# Altium PCB 精简焊台.PcbDoc
Units mm, origin at the board's own origin, x right, y up, seen from the top; angles counter-clockwise.
Board outline 70 x 50.01 mm, 2 copper layers (Top Layer, Bottom Layer), stack 0.325 mm thick; 94 components, 71 nets, 283 pads, 209 vias.
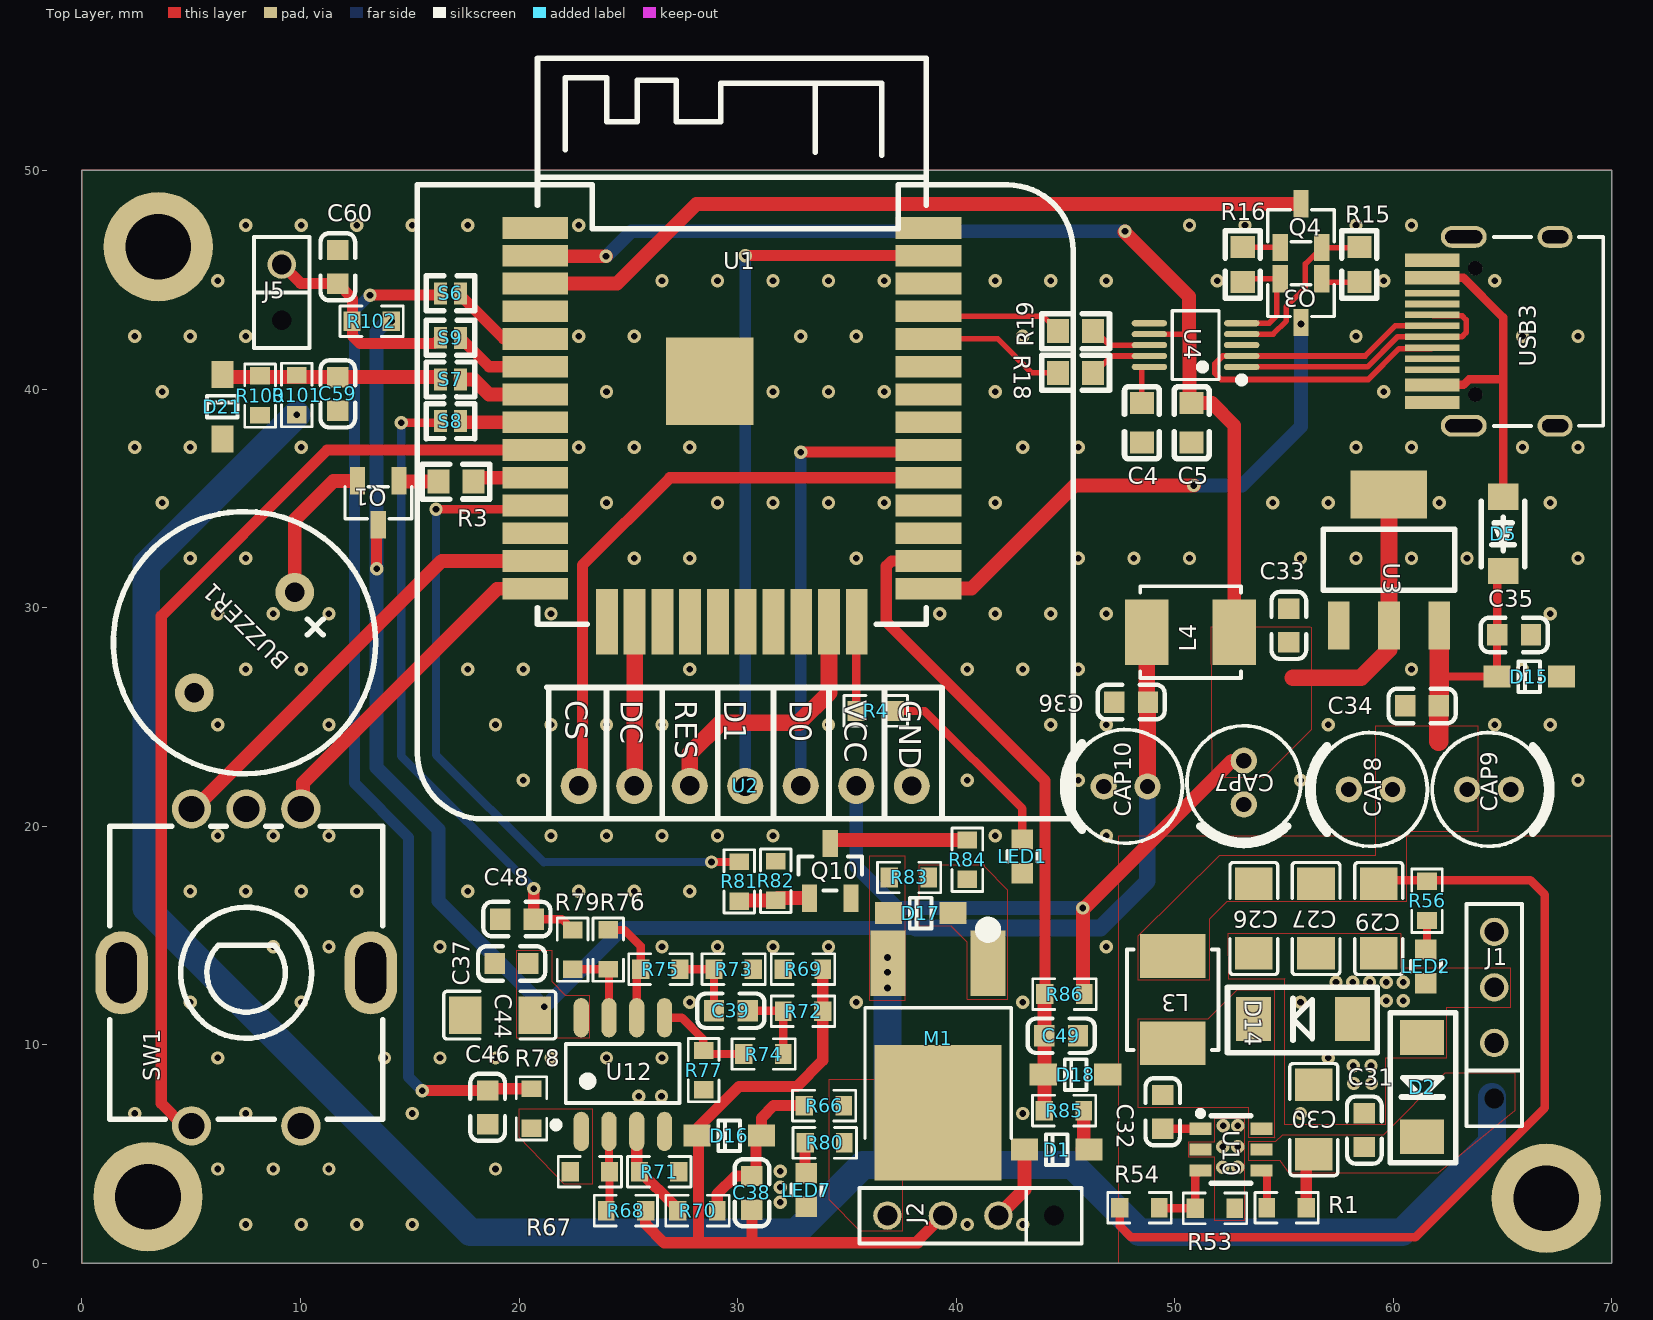
[diagram p0: Top Layer view]
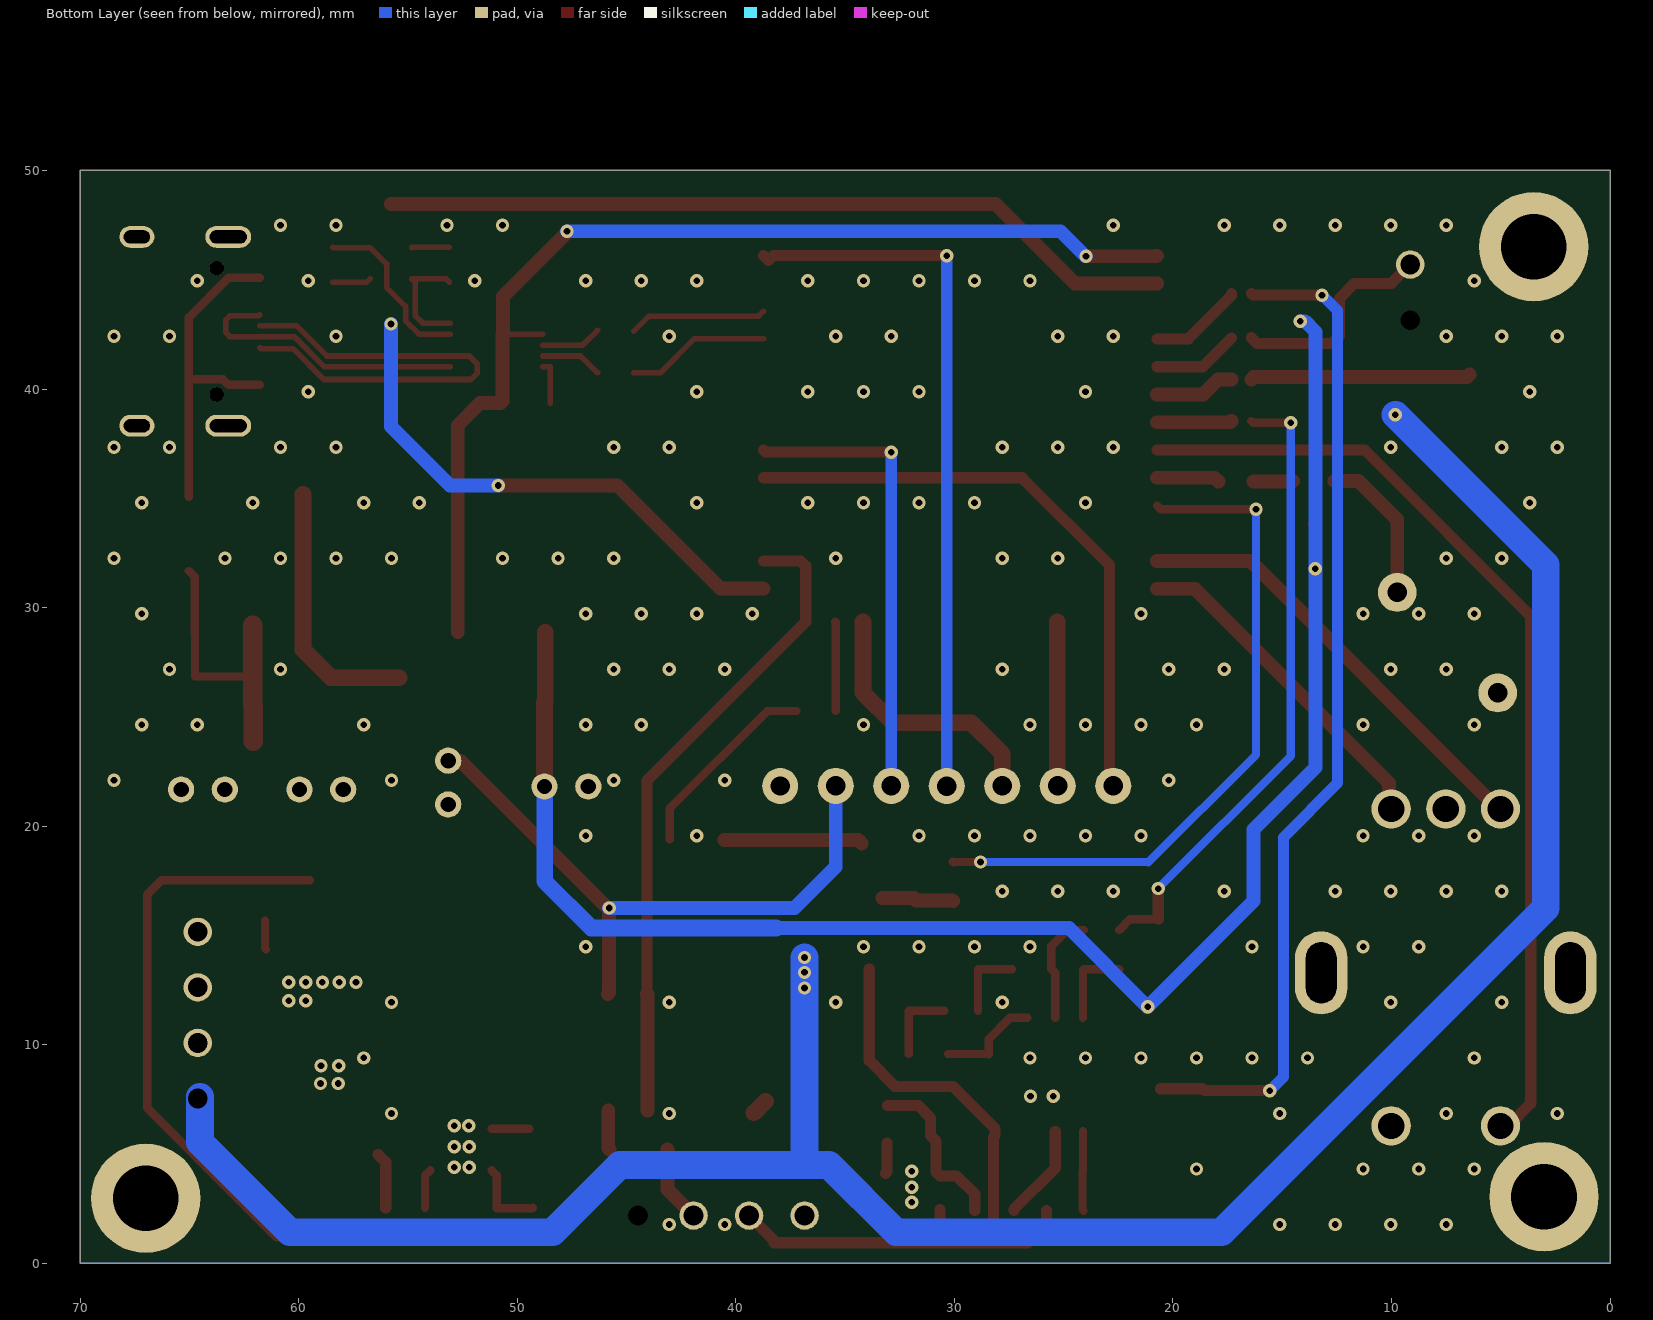
[diagram p1: Bottom Layer view, seen from below]

## Layer stack, top to bottom
Top Solder: solder mask 0.0102, Solder Resist, Dk 3.5
Top Layer: signal copper 0.0356
Dielectric 1: core 0.254, FR-4, Dk 4.2
Bottom Layer: signal copper 0.0356
Bottom Solder: solder mask 0.0102, Solder Resist, Dk 3.5

## Board outline
0,0 0,50.013 70.002,50.013 70.002,0

## Design rules (kind name [scope] priority, off if disabled: settings)
AssemblyTestPointUsage [All] p0: scope1count=1 scope1_0_kind=Board scope1_0_value=Board scope2count=1 scope2_0_kind=Board scope2_0_value=Board commentlength=0
AssemblyTestpoint [All] p0: scope1count=1 scope1_0_kind=Board scope1_0_value=Board scope2count=1 scope2_0_kind=Board scope2_0_value=Board commentlength=0
Clearance [All] p0: scope1count=1 scope1_0_kind=Board scope1_0_value=Board scope2count=1 scope2_0_kind=Board scope2_0_value=Board commentlength=0 gap=0.178
Clearance [All] p1: gap=0.178 ignorepadtopadclearanceinfootprint=FALSE
ComponentClearance [All] p0: scope1count=1 scope1_0_kind=Board scope1_0_value=Board scope2count=1 scope2_0_kind=Board scope2_0_value=Board commentlength=0 gap=0.254 collisioncheckmode=3
DiffPairsRouting [All] p0: scope1count=1 scope1_0_kind=Board scope1_0_value=Board scope2count=1 scope2_0_kind=Board scope2_0_value=Board commentlength=0
FabricationTestPointUsage [All] p0: scope1count=1 scope1_0_kind=Board scope1_0_value=Board scope2count=1 scope2_0_kind=Board scope2_0_value=Board commentlength=0 valid=0 allowmultiple=FALSE
FabricationTestpoint [All] p0: scope1count=1 scope1_0_kind=Board scope1_0_value=Board scope2count=1 scope2_0_kind=Board scope2_0_value=Board commentlength=0 side=3 testpointundercomponent=TRUE minsize=1.016 maxsize=2.54 preferedsize=1.524 minholesize=0 maxholesize=1.016 preferedholesize=0.813 testpointgrid=0.025
FanoutControl Fanout_BGA [All] p0 off: scope1count=1 scope1_0_kind=Board scope1_0_value=Board scope2count=1 scope2_0_kind=Board scope2_0_value=Board commentlength=69 // Protel DXP Scope 1 Expression Was: IsBGA   Fanout_BGA (Default Rule)
FanoutControl Fanout_LCC [All] p0 off: scope1count=1 scope1_0_kind=Board scope1_0_value=Board scope2count=1 scope2_0_kind=Board scope2_0_value=Board commentlength=69 // Protel DXP Scope 1 Expression Was: IsLCC   Fanout_LCC (Default Rule)
FanoutControl Fanout_SOIC [All] p0 off: scope1count=1 scope1_0_kind=Board scope1_0_value=Board scope2count=1 scope2_0_kind=Board scope2_0_value=Board commentlength=71 // Protel DXP Scope 1 Expression Was: IsSOIC   Fanout_SOIC (Default Rule)
FanoutControl Fanout_Small [All] p0 off: scope1count=1 scope1_0_kind=Board scope1_0_value=Board scope2count=1 scope2_0_kind=Board scope2_0_value=Board commentlength=84 // Protel DXP Scope 1 Expression Was: (CompPinCount < 5)   Fanout_Small (Default Rule)
FanoutControl Fanout_Default [All] p0: scope1count=1 scope1_0_kind=Board scope1_0_value=Board scope2count=1 scope2_0_kind=Board scope2_0_value=Board commentlength=30 // Fanout_Default (Default Rule)
Height [All] p0: scope1count=1 scope1_0_kind=Board scope1_0_value=Board scope2count=1 scope2_0_kind=Board scope2_0_value=Board commentlength=0
HoleSize [All] p0: scope1count=1 scope1_0_kind=Board scope1_0_value=Board scope2count=1 scope2_0_kind=Board scope2_0_value=Board commentlength=0 absolutevalues=TRUE maxlimit=2.54 minlimit=0.025 maxpercent=80.000 minpercent=20.000
HoleToHoleClearance [All] p0: scope1count=1 scope1_0_kind=Board scope1_0_value=Board scope2count=1 scope2_0_kind=Board scope2_0_value=Board commentlength=0
LayerPairs [All] p0: scope1count=1 scope1_0_kind=Board scope1_0_value=Board scope2count=1 scope2_0_kind=Board scope2_0_value=Board commentlength=0 enforce=TRUE
MinimumSolderMaskSliver [All] p0: scope1count=1 scope1_0_kind=Board scope1_0_value=Board scope2count=1 scope2_0_kind=Board scope2_0_value=Board commentlength=0
NetAntennae [All] p0: scope1count=1 scope1_0_kind=Board scope1_0_value=Board scope2count=1 scope2_0_kind=Board scope2_0_value=Board commentlength=0
PasteMaskExpansion [All] p0: scope1count=1 scope1_0_kind=Board scope1_0_value=Board scope2count=1 scope2_0_kind=Board scope2_0_value=Board commentlength=0 expansion=0
PlaneClearance [All] p0: scope1count=1 scope1_0_kind=Board scope1_0_value=Board scope2count=1 scope2_0_kind=Board scope2_0_value=Board commentlength=0 clearance=0.508
PlaneConnect [All] p0: scope1count=1 scope1_0_kind=Board scope1_0_value=Board scope2count=1 scope2_0_kind=Board scope2_0_value=Board commentlength=0 planeconnectstyle=Relief reliefexpansion=0.508 reliefentries=4 reliefconductorwidth=0.254 reliefairgap=0.254
PolygonConnect PolygonConnect_2 [All] p0: scope1count=1 scope1_0_kind=Board scope1_0_value=Board scope2count=1 scope2_0_kind=Board scope2_0_value=Board commentlength=0 connectstyle=Direct reliefconductorwidth=0.254 reliefentries=4 polygonreliefangle="90 Angle"
PolygonConnect PolygonConnect_1 [All] p0 off: scope1count=1 scope1_0_kind=Board scope1_0_value=Board scope2count=1 scope2_0_kind=Board scope2_0_value=Board commentlength=44 connectstyle=Direct reliefconductorwidth=0.254 reliefentries=4 polygonreliefangle="90 Angle" // Protel DXP Scope 1 Expression Was: IsVia
PolygonConnect [All] p0: scope1count=1 scope1_0_kind=Board scope1_0_value=Board scope2count=1 scope2_0_kind=Board scope2_0_value=Board commentlength=0 connectstyle=Relief reliefconductorwidth=0.254 reliefentries=4 polygonreliefangle="90 Angle"
PolygonConnect PolygonConnect_2 [All] p1: connectstyle=Direct reliefconductorwidth=0.254 reliefentries=4 polygonreliefangle="90 Angle" airgapwidth=0.254
PolygonConnect PolygonConnect_1 [IsVia] p2: connectstyle=Direct reliefconductorwidth=0.254 reliefentries=4 polygonreliefangle="90 Angle" airgapwidth=0.254
PolygonConnect [All] p3: connectstyle=Relief reliefconductorwidth=0.254 reliefentries=4 polygonreliefangle="90 Angle" airgapwidth=0.254
RoutingCorners [All] p0: scope1count=1 scope1_0_kind=Board scope1_0_value=Board scope2count=1 scope2_0_kind=Board scope2_0_value=Board commentlength=0 cornerstyle=45-Degree minsetback=2.54 maxsetback=2.54
RoutingLayers [All] p0: scope1count=1 scope1_0_kind=Board scope1_0_value=Board scope2count=1 scope2_0_kind=Board scope2_0_value=Board commentlength=0 top layer=Automatic bottom layer=Automatic
RoutingPriority [All] p0: scope1count=1 scope1_0_kind=Board scope1_0_value=Board scope2count=1 scope2_0_kind=Board scope2_0_value=Board commentlength=0
RoutingTopology [All] p0: scope1count=1 scope1_0_kind=Board scope1_0_value=Board scope2count=1 scope2_0_kind=Board scope2_0_value=Board commentlength=0 topology=Shortest
RoutingVias [All] p0: scope1count=1 scope1_0_kind=Board scope1_0_value=Board scope2count=1 scope2_0_kind=Board scope2_0_value=Board commentlength=0 holewidth=0.711 width=1.27 viastyle="Through Hole" minholewidth=0.711 minwidth=1.27 maxholewidth=0.711 maxwidth=1.27
RoutingVias [All] p1: holewidth=0.711 width=1.27 viastyle="Through Hole" minholewidth=0.711 minwidth=1.27 maxholewidth=0.711 maxwidth=1.27
ShortCircuit [All] p0: scope1count=1 scope1_0_kind=Board scope1_0_value=Board scope2count=1 scope2_0_kind=Board scope2_0_value=Board commentlength=0 allowed=FALSE
SilkToBoardRegionClearance [All] p0: scope1count=1 scope1_0_kind=Board scope1_0_value=Board scope2count=1 scope2_0_kind=Board scope2_0_value=Board commentlength=0
SilkToSilkClearance [All] p0: scope1count=1 scope1_0_kind=Board scope1_0_value=Board scope2count=1 scope2_0_kind=Board scope2_0_value=Board commentlength=0
SilkToSolderMaskClearance [All] p0 off: scope1count=1 scope1_0_kind=Board scope1_0_value=Board scope2count=1 scope2_0_kind=Board scope2_0_value=Board commentlength=44 // Protel DXP Scope 1 Expression Was: IsPad
SolderMaskExpansion [All] p0: scope1count=1 scope1_0_kind=Board scope1_0_value=Board scope2count=1 scope2_0_kind=Board scope2_0_value=Board commentlength=0 expansion=0.064
SolderMaskExpansion [All] p1: expansion=0.064
UnRoutedNet [All] p0: scope1count=1 scope1_0_kind=Board scope1_0_value=Board scope2count=1 scope2_0_kind=Board scope2_0_value=Board commentlength=0
UnpouredPolygon [All] p0: scope1count=1 scope1_0_kind=Board scope1_0_value=Board scope2count=1 scope2_0_kind=Board scope2_0_value=Board commentlength=0
Width Width_1 [All] p0: scope1count=1 scope1_0_kind=NetClass scope1_0_value="New Class" scope2count=1 scope2_0_kind=Board scope2_0_value=Board commentlength=0 maxlimit=2.54 minlimit=0.254 preferedwidth=0.508
Width [All] p0: scope1count=1 scope1_0_kind=Board scope1_0_value=Board scope2count=1 scope2_0_kind=Board scope2_0_value=Board commentlength=0 maxlimit=2.54 minlimit=0.254 preferedwidth=0.254
Width Width_1 [InNetClass('New Class')] p1: maxlimit=2.54 minlimit=0.254 preferedwidth=0.508
Width [All] p2: maxlimit=2.54 minlimit=0.254 preferedwidth=0.254
30 further rules are at their usual default settings.

## Classes and differential pairs
net class "New Class": 5V AVCC DVCC NetD17_1 NetJ2_4 VBUS VIN

## Components (designator, comment, footprint, x,y, rotation, side; value= is the part's Value field where it differs from the comment)
BUZZER1 "GMC1205YA-16R2048" BUZ-TH_BD12.0-P6.50-D0.6-FD 7.442,28.397 r45 top
C4 "1u" C0603 48.501,38.456 r270 top
C5 "10u" C0603 50.775,38.456 r90 top
C26 "10uF" 电容 53.848,15.875 r270 top
C27 "10uF" 电容 56.694,15.875 r270 top
C29 "0.1uF" 电容 59.563,15.875 r270 top
C30 "4.7uF" 电容 56.134,6.477 r90 top
C31 "0.1uF" 0603C 58.674,6.096 r90 top
C32 "0.1uF" 0603C 49.454,6.934 r270 top
C33 "0.1uF" 0603C 55.22,29.185 r270 top
C34 "0.1uF" 0603C 61.316,25.502 r0 top
C35 "0.1uF" 0603C 65.532,28.753 r0 top
C36 "0.1uF" 0603C 48.006,25.679 r0 top
C37 "0.1uF" 0603C 19.66,13.716 r0 top
C38 "0.1uF" 0603C 30.658,3.226 r270 top
C39 "0.1uF" 0603C 29.693,11.557 r180 top
C44 "4.7uF" 电容 19.025,11.582 r0 top
C46 "10nF" 0603C 18.567,7.137 r270 top
C48 "10nF" 0603C 19.906,15.748 r180 top
C49 "0.1uF" 0603C 44.806,10.414 r180 top
C59 "1uF" 0603C 11.709,39.776 r270 top
C60 "1uF" 0603C 11.709,45.593 r90 top
CAP7 "22uF" CAPX-5.0 53.162,21.996 r90 top
CAP8 "22uF" CAPX-5.0 58.963,21.679 r0 top
CAP9 "100uF" CAPX-5.0 64.38,21.679 r180 top
CAP10 "22uF" CAPX-5.0 47.752,21.819 r0 top
D1 "1N4148" LC-SOD-123 44.602,5.207 r0 top
D2 "TVS" "二极管 SMA(DO-214AC)" 61.316,10.123 r270 top
D5 "1N5819HW-7-F" SOD-123_L2.8-W1.8-LS3.7-FD 65.024,33.376 r270 top
D14 "B5819" "二极管 SMA(DO-214AC)" 57.926,11.176 r180 top
D15 "SMA6.0A" LC-SOD-123 66.218,26.848 r0 top
D16 "1N4148" LC-SOD-123 29.616,5.842 r0 top
D17 "ZMM12" LC-SOD-123 38.379,16.027 r0 top
D18 "SMF3.3A" LC-SOD-123 45.466,8.636 r0 top
D21 "SMF3.3A" LC-SOD-123 6.426,39.192 r270 top
J1 "CONN4" SIP-4 64.618,7.544 r90 top
J2 "CONN4" SIP-4 44.475,2.184 r180 top
J5 "NTC 10K" SIP-2 9.144,43.155 r90 top
L3 "22uH" LIN0520 49.911,12.065 r90 top
L4 "22uH" LIN0520 50.724,28.88 r180 top
LED1 "LED" LC-0603-LED 43.028,18.618 r270 top
LED2 "LED" LC-0603-LED 61.493,13.589 r270 top
LED7 "LED" LC-0603-LED 33.147,3.353 r270 top
M1 "MOS-ASM6115" MOS-ASM6115 39.802,9.5 r90 top
Q1 "S8050" SOT-23-3_L2.9-W1.3-P1.90-LS2.4-BR 13.564,34.798 r90 top
Q3 "S8050" SOT-23-3_L2.9-W1.3-P1.90-LS2.4-BR 55.778,44.044 r90 top
Q4 "S8050" SOT-23-3_L2.9-W1.3-P1.90-LS2.4-BR 55.778,47.473 r270 top
Q10 "S8050" LC-SOT-23(SOT-23-3) 34.239,17.958 r270 top
R1 "100K" 0603R 55.118,2.54 r0 top
R3 "10k" R0603 17.12,35.763 r0 top
R4 "2K" 0603R 36.322,25.273 r180 top
R15 "10k" R0603 58.445,45.695 r90 top
R16 "10k" R0603 53.111,45.695 r270 top
R18 "220R" R0603 45.466,40.742 r180 top
R19 "220R" R0603 45.466,42.647 r180 top
R53 "18K" 0603R 51.841,2.515 r180 top
R54 "100K" 0603R 48.387,2.54 r180 top
R56 "3K" 0603R 61.544,16.586 r90 top
R66 "10K" 0603R 33.96,7.214 r180 top
R67 "200K" 0603R 23.241,4.191 r180 top
R68 "2K" 0603R 24.892,2.413 r0 top
R69 "0.02R" 0603R 32.995,13.462 r180 top
R70 "2K" 0603R 28.169,2.413 r180 top
R71 "200K" 0603R 26.416,4.191 r0 top
R72 "10R" 0603R 32.995,11.532 r0 top
R73 "10R" 0603R 29.82,13.462 r0 top
R74 "1K" 0603R 31.191,9.576 r180 top
R75 "1K" 0603R 26.467,13.462 r180 top
R76 "20K" 0603R 24.079,14.351 r90 top
R77 "20K" 0603R 28.448,8.839 r270 top
R78 "1K" 0603R 20.574,7.087 r270 top
R79 "10K" 0603R 22.454,14.351 r270 top
R80 "10K" 0603R 33.985,5.512 r180 top
R81 "1K" 0603R 30.074,17.475 r270 top
R82 "51K" 0603R 31.75,17.501 r270 top
R83 "10K" 0603R 37.846,17.653 r180 top
R84 "2K" 0603R 40.513,18.466 r270 top
R85 "1K" 0603R 44.938,6.985 r180 top
R86 "10K" 0603R 44.958,12.319 r180 top
R100 "1K" 0603R 8.153,39.7 r90 top
R101 "10K" 0603R 9.83,39.726 r270 top
R102 "10K" 0603R 13.259,43.104 r0 top
S6 "Solder" SW_HAND_WELD_JX 16.866,44.374 r180 top
S7 "Solder" SW_HAND_WELD_JX 16.866,40.437 r180 top
S8 "Solder" SW_HAND_WELD_JX 16.866,38.534 r180 top
S9 "Solder" SW_HAND_WELD_JX 16.866,42.342 r180 top
SW1 "Rotary Enc" SW-TH_PEC11R-4XXXF-SXXXX 7.518,13.538 r0 top
U1 "ESP32-S" WIRELM-SMD_ESP32-S 29.735,38.366 r0 top
U2 "" "OLED 12864 SPI 7P" 30.352,21.84 r0 top
U3 "AMS1117" "LDO线性稳压 (SOT-223)" 59.803,32.185 r270 top
U4 "CH340E" MSOP-10_L3.0-W3.0-P0.50-LS5.0-BL 50.952,42.012 r90 top
U10 "LMR16006" "开关电源 (LMR16006)" 52.959,5.334 r270 top
U12 "GS8552" LC-SOP-8-150MIL 24.74,8.636 r0 top
USB3 "USB-TYPEC-16P" USB-TYPE-C-16P 67.404,38.321 r90 top

## Footprints (in the part's own frame and the unit in brackets; to place one, negate y for a bottom-side part, rotate by r counter-clockwise, add the part's x,y. Pads: shape width x height; smd on the part's side, far side on the other; paste and mask are expansions set on the pad)
0603C [mm]
  rect 0.93x0.98 smd: 1(-0.77,0) 2(0.77,0)
  silkscreen extent -1.53,-0.79 1.54,0.79
0603R [mm]
  rect 0.762x0.9 smd: 1(-0.9,0)
  rect 0.8x0.9 smd: 2(0.9,0)
  silkscreen extent -1.45,-0.7 1.45,0.7
BUZ-TH_BD12.0-P6.50-D0.6-FD [mil]
  round 70 hole 35.4: 1(128,0) 2(-128,0)
  silkscreen extent -236,-236 236,236
C0603 [mm]
  rect 1x1.1 smd: 1(-0.9,0) 2(0.9,0)
  silkscreen extent -1.65,-0.8 1.65,0.8
CAPX-5.0 [mm]
  round 1.2 hole 0.7: 1(1,0) 2(-1,0)
  silkscreen extent -2.83,-2.6 2.6,2.6
LC-0603-LED [mm]
  rect 0.93x0.98 smd: A(-0.77,0) K(0.77,0)
  silkscreen extent -0.25,-0.69 0.25,0.69
LC-SOD-123 [mm]
  rect 1.25x1 smd: 1(1.475,0) 2(-1.475,0)
  silkscreen extent -0.5,-0.7 0.5,0.7
LC-SOP-8-150MIL [mm]
  oval 0.7x1.8 smd: 1(-1.893,-2.6) 2(-0.623,-2.6) 3(0.647,-2.6) 4(1.917,-2.6) 5(1.917,2.6) 6(0.647,2.6) 7(-0.623,2.6) 8(-1.893,2.6)
  silkscreen extent -3.2,-2.45 2.6,1.4
LC-SOT-23(SOT-23-3) [mm]
  rect 1.25x0.7 smd: 1(1.25,-0.95) 2(1.25,0.95) 3(-1.25,0)
  silkscreen extent -0.65,-1.46 0.9,1.46
"LDO线性稳压 (SOT-223)" [mm]
  rect 2.2x1 smd: 1(3,-2.3) 2(3,0) 3(3,2.3)
  rect 2.2x3.5 smd: 2(-3,0)
  silkscreen extent -1.4,-3 1.4,3
LIN0520 [mm]
  rect 2x3 smd: 1(-2,0) 2(2,0)
  silkscreen extent -2.3,-2.1 2.3,2.1
MOS-ASM6115 [mm]
  rect 3x1.6 smd: 1(4.233,-1.662) 3(4.233,2.918)
  rect 6.2x5.8 smd: 2(-2.615,0.628)
  silkscreen extent -3.78,-2.72 6.06,3.97
MSOP-10_L3.0-W3.0-P0.50-LS5.0-BL [mm]
  oval 0.28x1.62 smd: 1(-1,-2.11) 2(-0.5,-2.11) 3(0,-2.11) 4(0.5,-2.11) 5(1,-2.11) 6(1,2.11) 7(0.5,2.11) 8(0,2.11) 9(-0.5,2.11) 10(-1,2.11)
  silkscreen extent -1.74,-2.26 1.58,1.07
"OLED 12864 SPI 7P" [mm]
  round 1.65 hole 0.89: 1(7.619,-0.001) 2(5.079,0.004) 3(2.539,0.004) 4(-0.001,-0.004) 5(-2.539,0.001) 6(-5.079,0.001) 7(-7.619,0.004)
  silkscreen extent -15,-1.5 15,27.5
R0603 [mm]
  rect 1x1.1 smd: 1(-0.8,0) 2(0.8,0)
  silkscreen extent -1.55,-0.8 1.55,0.81
SIP-2 [mm]
  round 0 hole 0.9: 1(0,0)
  round 1.3 hole 0.9: 2(2.54,0)
  silkscreen extent -1.27,-1.27 3.81,1.27
SIP-4 [mm]
  round 0 hole 0.9: 1(0,0)
  round 1.3 hole 0.9: 2(2.54,0) 3(5.08,0) 4(7.62,0)
  silkscreen extent -1.27,-1.27 8.89,1.27
SOD-123_L2.8-W1.8-LS3.7-FD [mm]
  rect 1.2x1.4 smd: 1(-1.7,0) 2(1.7,0)
  silkscreen extent -1.5,-1 1.5,1
SOT-23-3_L2.9-W1.3-P1.90-LS2.4-BR [mm]
  rect 1.25x0.7 smd: 1(1,-0.95) 2(1,0.95) 3(-1,0)
  silkscreen extent -0.73,-1.53 0.73,1.53
SW-TH_PEC11R-4XXXF-SXXXX [mm]
  round 1.8 hole 1.2: 1(2.5,-7.25) 2(-2.5,-7.25) A(2.5,7.25) B(-2.5,7.25) C(0,7.25)
  oval 2.4x3.8 hole 1.4 slot 2.8 at 90 deg: MT1(5.7,-0.25) MT2(-5.7,-0.25)
  silkscreen extent -6.25,-6.95 6.25,6.45
SW_HAND_WELD_JX [mm]
  rect 0.6x1 smd: 1(-0.45,0.002) 2(0.45,-0.003)
  silkscreen extent -1.1,-0.8 1.1,0.8
USB-TYPE-C-16P [mm]
  oval 1x2.1 hole 0.6 slot 1.7 at 90 deg: 0(0,4.18) 0(8.64,4.18)
  oval 1x1.6 hole 0.6 slot 1.2 at 90 deg: 0(0,0) 0(8.64,0)
  rect 0.6x2.5 smd: A1(1.07,5.625) A4(1.87,5.625) A9(6.77,5.625) A12(7.57,5.625)
  rect 0.3x2.5 smd: A5(3.07,5.625) A6(4.07,5.625) A7(4.57,5.625) A8(5.57,5.625) B5(6.07,5.625) B6(5.07,5.625) B7(3.57,5.625) B8(2.57,5.625)
  round 0.65 hole 0.65 slot 0.655 at 90 deg: G(1.43,3.65) G(7.21,3.65)
  silkscreen extent -0.01,-2.2 8.64,2.79
WIRELM-SMD_ESP32-S [mm]
  rect 3x1 smd: 1(-9,9.005) 2(-9,7.735) 3(-9,6.465) 4(-9,5.195) 5(-9,3.925) 6(-9,2.655) 7(-9,1.385) 8(-9,0.115) 9(-9,-1.155) 10(-9,-2.425) 11(-9,-3.695) 12(-9,-4.965) 13(-9,-6.235) 14(-9,-7.505) 25(9,-7.505) 26(9,-6.235) 27(9,-4.965) 28(9,-3.695) 29(9,-2.425) 30(9,-1.155) 31(9,0.115) 32(9,1.385) 33(9,2.655) 34(9,3.925) 35(9,5.195) 36(9,6.465) 37(9,7.735) 38(9,9.005)
  rect 1x3 smd: 15(-5.715,-9.005) 16(-4.445,-9.005) 17(-3.175,-9.005) 18(-1.905,-9.005) 19(-0.635,-9.005) 20(0.635,-9.005) 21(1.905,-9.005) 22(3.175,-9.005) 23(4.445,-9.005) 24(5.715,-9.005)
  rect 4x4 smd: 39(-1,1.995)
  silkscreen extent -8.89,-9.13 8.89,16.78
"二极管 SMA(DO-214AC)" [mil]
  rect 63x78.74 smd: 1(-8,0) 2(170.56,0)
  silkscreen extent -53,-57 217,61
"开关电源 (LMR16006)" [mm]
  rect 0.55x1 smd: 1(-0.823,-1.786) 2(0.127,-1.786) 3(1.077,-1.786) 4(1.077,1.014) 5(0.127,1.014) 6(-0.823,1.014)
  silkscreen extent -1.65,-1.91 1.68,0.51
电容 [mm] "1206"
  rect 1.485x1.728 smd: 1(-1.493,-0.228) 2(1.692,-0.228)
  silkscreen extent -2.46,-1.32 2.66,0.86

## Part data
D2: library part B5819
R1 R53: library part 2K
R54: library part 10K
U2: library part 0.96OLED
U3: "线性稳压3.3V-5V 1A"
U10: library part HT7463B

## Free pads (board coordinates)
  round 5 hole 3 unplated: 8(3.5,46.513) 10(3.025,3.051) 10(67.002,2.975)

## Via types
v1: diameter 0.61, hole 0.305, Top Layer to Bottom Layer, 167 vias
v2: diameter 0.61, hole 0.305, Top Layer to Bottom Layer, tented both sides, 42 vias

## Nets (pads, with @x,y where several pads share a name; then routed paths per layer and width w, separated by ;. In a path a pad name is that pad's centre, name@x,y a point inside that pad or via, vN(x,y) a via of type N, cw(c..) or ccw(c..) an arc to the next point about the centre after c; other vN are vias at no path point)
5V: C26.1 C27.1 C29.1 C34.2 C35.1 CAP8.1 CAP9.1 D5.2 D15.2 L3.2 R54.2 R56.2 U3.3 | length 53.3
  Top Layer w0.381: R54.2 47.487,1.713 48.006,1.194 61.011,1.194 66.929,7.112 66.929,16.866 66.269,17.526 C29.1@59.493,17.526 ; 62.111,26.848 D15.2 64.743,28.734 C35.1 64.762,31.414 D5.2
  Top Layer w0.889: 62.086,23.884 C34.2 62.111,25.527 62.111,26.848 62.103,26.856 U3.3
AVCC: C36.2 C37.2 C44.2 CAP10.1 L4.2 Q1.3 R102.2 U12.8 | length 78.4
  Top Layer w0.508: v2(13.487,31.775) 13.487,33.722 Q1.3
  Top Layer w0.762: L4.2 48.724,25.684 48.752,25.655 CAP10.1
  Bottom Layer w0.635: v2(14.173,43.104) 13.97,43.104 13.487,42.621 v2(13.487,31.775) 13.487,22.682 16.319,19.85 16.319,16.573 v2(21.158,11.735) 24.765,15.342 38.151,15.342
  Bottom Layer w0.762: 38.151,15.342 46.609,15.342 48.743,17.475 CAP10.1@48.743,21.819
DVCC: C5.2 C33.2 CAP7.1 L4.1 R86.1 U1.2 U2.2 U3.2 U4.7 | length 91.3
  Top Layer w0.254: U4.7 50.656,42.512 50.673,42.494
  Top Layer w0.635: U1.2 20.76,46.076 v2(23.978,46.076) ; R86.1 45.796,12.381 v2(45.796,16.256) 45.872,16.256 52.613,22.996 CAP7.1 ; v2(47.727,47.219) 47.701,47.193 50.656,44.239 50.656,42.512 ; 50.673,42.494 50.673,39.457 C5.2 51.703,39.356 52.724,38.335 L4.1
  Top Layer w0.762: 55.397,26.797 58.522,26.797 59.803,28.078 59.803,29.185 U3.2@59.803,35.185
  Bottom Layer w0.635: v2(23.978,46.076) 24.003,46.076 25.146,47.219 v2(47.727,47.219) ; U2.2 35.43,18.138 37.313,16.256 v2(45.796,16.256)
GND: BUZZER1.2 C4.2 C5.1 C26.2 C27.2 C29.2 C30.2 C31.2 C33.1 C34.1 C35.2 C36.1 C37.1 C44.1 C46.2 C48.2 C49.1 C59.2 C60.2 CAP7.2 CAP8.2 CAP9.2 CAP10.2 D2.1 D14.1 D15.1 D18.1 D21.1 J1.3 J2.1 J5.1 LED1.K LED2.K LED7.K Q10.2 R53.1 R69.2 R71.2 R73.2 R77.2 R82.1 R100.1 SW1.1 SW1.C U1.1 U1.15 U1.38 U1.39 U2.1 U3.1 U4.3 U10.2 U12.4 USB3.0 USB3.A1 USB3.A12
  other v1: 7.493,1.778 10.033,1.778 12.573,1.778 15.113,1.778 40.513,1.778 43.053,1.778 6.223,4.318 8.763,4.318 11.303,4.318 18.923,4.318 2.413,6.858 7.493,6.858 15.113,6.858 43.053,6.858 55.753,6.858 6.223,9.398 13.843,9.398 16.383,9.398 18.923,9.398 21.463,9.398 24.003,9.398 26.543,9.398 57.023,9.398 4.953,11.938 10.033,11.938 27.813,11.938 35.433,11.938 43.053,11.938 55.753,11.938 8.763,14.478 11.303,14.478 16.383,14.478 26.543,14.478 29.083,14.478 31.623,14.478 34.163,14.478 46.863,14.478 4.953,17.018 7.493,17.018 10.033,17.018 12.573,17.018 17.653,17.018 22.733,17.018 25.273,17.018 27.813,17.018 6.223,19.558 8.763,19.558 11.303,19.558 21.463,19.558 24.003,19.558 26.543,19.558 29.083,19.558 31.623,19.558 41.783,19.558 46.863,19.558 20.193,22.098 40.513,22.098 45.593,22.098 55.753,22.098 68.453,22.098 6.223,24.638 11.303,24.638 18.923,24.638 21.463,24.638 24.003,24.638 26.543,24.638 34.163,24.638 44.323,24.638 46.863,24.638 57.023,24.638 64.643,24.638 67.183,24.638 7.493,27.178 10.033,27.178 17.653,27.178 20.193,27.178 27.813,27.178 40.513,27.178 43.053,27.178 45.593,27.178 60.833,27.178 65.913,27.178 6.223,29.718 8.763,29.718 11.303,29.718 21.463,29.718 39.243,29.718 41.783,29.718 44.323,29.718 46.863,29.718 67.183,29.718 4.953,32.258 7.493,32.258 25.273,32.258 27.813,32.258 35.433,32.258 45.593,32.258 48.133,32.258 50.673,32.258 55.753,32.258 58.293,32.258 60.833,32.258 63.373,32.258 68.453,32.258 3.683,34.798 24.003,34.798 29.083,34.798 31.623,34.798 34.163,34.798 36.703,34.798 41.783,34.798 54.483,34.798 57.023,34.798 62.103,34.798 67.183,34.798 2.413,37.338 4.953,37.338 10.033,37.338 22.733,37.338 25.273,37.338 27.813,37.338 43.053,37.338 45.593,37.338 58.293,37.338 60.833,37.338 65.913,37.338 68.453,37.338 3.683,39.878 24.003,39.878 31.623,39.878 34.163,39.878 36.703,39.878 41.783,39.878 59.563,39.878 2.413,42.418 4.953,42.418 7.493,42.418 22.733,42.418 25.273,42.418 32.893,42.418 35.433,42.418 43.053,42.418 58.293,42.418 65.913,42.418 68.453,42.418 6.223,44.958 26.543,44.958 29.083,44.958 31.623,44.958 34.163,44.958 36.703,44.958 41.783,44.958 44.323,44.958 46.863,44.958 51.943,44.958 59.563,44.958 64.643,44.958 7.493,47.498 10.033,47.498 12.573,47.498 15.113,47.498 17.653,47.498 22.733,47.498 50.673,47.498 53.213,47.498 58.293,47.498 60.833,47.498
  other v2: 31.953,2.794 31.953,3.48 31.953,4.216 52.197,4.394 52.883,4.394 52.197,5.334 52.883,5.334 52.222,6.299 52.883,6.299 25.476,7.645 26.518,7.645 58.191,8.23 59.004,8.23 58.166,9.042 58.979,9.042 59.684,12.014 60.452,12.014 57.379,12.852 58.147,12.852 58.915,12.852 59.684,12.852 60.452,12.852
NetBUZZER1_1: BUZZER1.1 Q1.2 | length 6.9
  Top Layer w0.635: BUZZER1.1 9.741,34.024 11.516,35.798 Q1.2
NetC4_1: C4.1 U4.10 | length 2
  Top Layer w0.254: C4.1 48.501,41.012 U4.10
NetC32_1: C32.1 D14.2 L3.1 U10.6
NetC32_2: C32.2 U10.1 | length 1.7
  Top Layer w0.381: C32.2 51.166,6.164 U10.1
NetC38_1: C38.1 D16.1 R66.2 R70.1 | length 7.7
  Top Layer w0.508: R70.1 29.069,3.161 29.904,3.996 C38.1 30.836,4.174 30.836,5.586 D16.1 31.091,6.657 31.648,7.214 R66.2
NetC38_2: C38.2 D16.2 J2.3 R68.2 R69.1 R72.2 | length 33.1
  Top Layer w0.508: R68.2 25.792,1.792 26.645,0.94 28.143,0.94 ; C38.2 30.658,0.991 30.709,0.94 ; R69.1 33.895,9.282 32.708,8.095 30.065,8.095 28.141,6.172 D16.2 28.219,5.764 28.219,0.94 30.709,0.94 ; J2.3 38.252,1.041 38.252,0.94 30.709,0.94
NetC39_1: C39.1 R72.1 R74.1 | length 3.6
  Top Layer w0.381: C39.1 32.069,11.557 R72.1 32.095,9.579 R74.1
NetC39_2: C39.2 R73.1 R75.1 | length 3.5
  Top Layer w0.381: R75.1 R73.1 28.92,11.56 C39.2
NetC46_1: C46.1 R78.1 S6.2 | length 46.3
  Top Layer w0.508: v2(13.183,44.298) 16.337,44.298 S6.2 ; v2(15.57,7.899) 18.525,7.899 18.55,7.925 C46.1 18.647,7.987 R78.1
  Bottom Layer w0.508: v2(13.183,44.298) 12.471,43.586 12.471,21.971 14.952,19.491 14.952,8.518 v2(15.57,7.899)
NetC48_1: C48.1 R79.1 S8.2 | length 29.1
  Top Layer w0.381: v2(14.605,38.456) 16.334,38.456 S8.2 ; C48.1 21.957,15.748 R79.1
  Top Layer w0.508: C48.1 v2(20.676,17.145)
  Bottom Layer w0.381: v2(14.605,38.456) 14.605,23.216 v2(20.676,17.145)
NetC49_2: C49.2 D18.2 R85.2 R86.2 U1.26 | length 30
  Top Layer w0.508: U1.26 37.033,32.131 36.803,31.901 36.803,29.338 44.058,22.084 R86.2
  Top Layer w0.635: R85.2 44.038,12.299 R86.2
NetC59_1: C59.1 D21.2 R100.2 R101.1 S7.2 | length 10.1
  Top Layer w0.635: D21.2 6.547,40.546 C59.1 16.309,40.546 S7.2
NetC60_1: C60.1 J5.2 R102.1 S9.2 | length 9.9
  Top Layer w0.508: J5.2 10.016,44.823 C60.1 12.384,44.148 12.384,42.429 12.725,42.088 16.159,42.088 S9.2
NetD1_1: D1.1 R85.1 | length 1.8
  Top Layer w0.635: D1.1@45.773,5.207 45.838,5.272 R85.1
NetD1_2: D1.2 J2.2 | length 3.5
  Top Layer w0.635: J2.2 43.127,3.376 D1.2
NetD17_1: D17.1 M1.1 R83.1 R84.2
NetJ2_4: J2.4 M1.2 R66.1 R80.1 | length 0.8
  Top Layer w0.762: M1.2@38.641,7.417 M1.2
NetLED1_A: LED1.A R4.1 | length 9.1
  Top Layer w0.381: R4.1 38.557,25.273 43.028,20.803 LED1.A
NetLED2_A: LED2.A R56.1 | length 1.3
  Top Layer w0.381: LED2.A 61.544,14.41 R56.1
NetLED7_A: LED7.A R80.2 | length 1.4
  Top Layer w0.508: R80.2 33.085,4.185 LED7.A
NetQ1_1: Q1.1 R3.1 | length 1.8
  Top Layer w0.635: Q1.1 14.548,35.763 R3.1
NetQ3_1: Q3.1 R15.1 | length 1.8
  Top Layer w0.254: Q3.1 56.877,44.895 R15.1
NetQ3_2: Q3.2 R16.2 U4.5 | length 5.3
  Top Layer w0.254: U4.5 54.315,43.012 54.673,43.37 54.673,44.889 Q3.2 53.26,45.044 R16.2
NetQ3_3: Q3.3 U1.25 | length 24.8
  Top Layer w0.635: U1.25 38.747,30.873 40.703,30.873 45.415,35.585 v2(50.876,35.585)
  Bottom Layer w0.635: v2(50.876,35.585) 53.086,35.585 55.778,38.278 v2(55.778,42.977)
NetQ4_1: Q4.1 R16.1 | length 1.7
  Top Layer w0.254: R16.1 54.806,46.495 Q4.1
NetQ4_2: Q4.2 R15.2 U4.4 | length 8
  Top Layer w0.254: U4.4 54.5,42.512 55.105,43.116 55.105,43.777 55.982,44.653 55.982,45.726 Q4.2 58.423,46.473 R15.2
NetQ4_3: Q4.3 U1.3 | length 36.6
  Top Layer w0.635: U1.3 24.486,44.831 28.127,48.473 Q4.3
NetQ10_1: Q10.1 R81.2 R82.2 | length 3.3
  Top Layer w0.635: R81.2 30.099,16.601 R82.2 31.857,16.708 Q10.1
NetQ10_3: Q10.3 R84.1 | length 6.3
  Top Layer w0.635: Q10.3 34.397,19.366 R84.1
NetR1_1: R1.1 U10.4 | length 1.8
  Top Layer w0.381: U10.4 54.218,4.012 R1.1
NetR3_2: R3.2 U1.10 | length 2.9
  Top Layer w0.635: R3.2 18.097,35.941 U1.10
NetR4_2: R4.2 U1.24 | length 4.1
  Top Layer w0.381: R4.2 35.422,29.333 U1.24
NetR18_1: R18.1 U4.9 | length 2.8
  Top Layer w0.254: R18.1@46.33,40.741 47.1,41.512 U4.9
NetR18_2: R18.2 U1.34 | length 6.6
  Top Layer w0.254: U1.34 41.91,42.291 43.459,40.742 R18.2
NetR19_1: R19.1 U4.8 | length 2.8
  Top Layer w0.254: R19.1@46.33,42.685 47.003,42.012 U4.8
NetR19_2: R19.2 U1.35 | length 6.3
  Top Layer w0.254: U1.35 38.964,43.332 43.98,43.332 R19.2
NetR53_2: R53.2 R54.1 U10.3 | length 3.5
  Top Layer w0.381: R54.1 49.312,2.515 R53.2 50.941,4.025 U10.3
NetR67_1: R67.1 R68.1 U12.2 | length 3.7
  Top Layer w0.381: R68.1@24.094,2.413 24.141,2.46 R67.1 24.117,4.215 U12.2
NetR67_2: R67.2 R78.2 U12.1
NetR70_2: R70.2 R71.1 U12.3 | length 4.4
  Top Layer w0.508: U12.3 25.387,4.371 27.269,2.489 R70.2
NetR74_2: R74.2 R77.1 U12.5 | length 4.7
  Top Layer w0.381: U12.5 27.448,11.236 28.423,10.262 28.423,9.561 28.437,9.576 R74.2
NetR75_2: R75.2 R76.2 U12.6 | length 5.1
  Top Layer w0.381: R76.2 24.83,15.251 25.567,14.514 R75.2 25.387,13.282 U12.6
NetR76_1: R76.1 R79.2 U12.7 | length 3.9
  Top Layer w0.381: R79.2 R76.1 24.117,13.414 U12.7
NetR81_1: R81.1 U1.11 | length 31.8
  Top Layer w0.381: v2(16.205,34.493) 20.557,34.493 U1.11 ; v2(28.804,18.364) 30.012,18.364 30.037,18.339 R81.1
  Bottom Layer w0.381: v2(16.205,34.493) v2@16.205,34.341 ; v2@16.231,34.315 v2@16.205,34.341 ; v2(28.804,18.364) 21.158,18.364 21.133,18.339 16.205,23.266 v2@16.205,34.341
NetS6_1: S6.1 U1.5 | length 4.3
  Top Layer w0.508: S6.1 17.316,44.279 19.304,42.291 U1.5
NetS7_1: S7.1 U1.7 | length 3.7
  Top Layer w0.635: S7.1 17.935,40.435 18.618,39.751 U1.7
NetS8_1: S8.1 U1.8 | length 3.4
  Top Layer w0.635: S8.1 17.367,38.481 U1.8
NetS9_1: S9.1 U1.6 | length 4
  Top Layer w0.508: S9.1 18.634,41.021 U1.6
NetSW1_2: SW1.2 U1.9 | length 44.5
  Top Layer w0.508: SW1.2@5.12,6.288 4.659,6.288 3.632,7.315 3.632,29.616 11.227,37.211 U1.9
NetSW1_A: SW1.A U1.14 | length 15.5
  Top Layer w0.635: SW1.A@10.12,20.788 10.12,21.982 18.999,30.861 U1.14
NetSW1_B: SW1.B U1.13 | length 20.3
  Top Layer w0.635: SW1.B@5.12,20.788 16.463,32.131 U1.13
NetU1_12: U1.12
NetU1_16: U1.16 U2.6 | length 7.5
  Top Layer w0.762: U2.6@25.29,21.841 U1.16
NetU1_23: U1.23 U2.5 | length 12.3
  Top Layer w0.762: U2.5 27.813,23.317 29.235,24.74 32.817,24.74 34.18,26.103 U1.23
NetU1_27: U1.27
NetU1_28: U1.28
NetU1_29: U1.29 U2.7 | length 27.7
  Top Layer w0.508: U2.7 22.911,22.022 22.911,31.953 26.899,35.941 U1.29
NetU1_30: U1.30 U2.3 | length 21.2
  Top Layer w0.508: v2(32.89,37.112) 38.636,37.112 U1.30
  Bottom Layer w0.508: U2.3 v2(32.89,37.112)
NetU1_33: U1.33
NetU1_36: U1.36
NetU1_37: U1.37 U2.4 | length 32.8
  Top Layer w0.508: v2(30.35,46.104) 38.275,46.104 38.506,45.872 U1.37
  Bottom Layer w0.508: U2.4 v2(30.35,46.104)
NetU2_2: 
NetU4_1: U4.1 USB3.A6 USB3.B6 | length 13.2
  Top Layer w0.254: U4.1 58.818,41.012 60.198,42.391 USB3.A6 63.139,42.391 63.334,42.586 63.334,43.167 63.155,43.346 61.824,43.346 USB3.B6
NetU4_2: U4.2 USB3.A7 USB3.B7 | length 21.8
  Top Layer w0.254: USB3.B7 61.734,41.846 60.263,41.846 58.854,40.437 52.121,40.437 51.841,40.716 51.841,41.156 52.197,41.512 U4.2 58.707,41.512 60.087,42.891 USB3.A7
PGND: 
VBUS: D5.1 USB3.A4 USB3.A9 | length 15.5
  Top Layer w0.381: USB3.A4 63.211,40.191 63.464,40.444 65.024,40.444 ; USB3.A9 63.211,45.091 65.024,43.278 D5.1
VIN: C30.1 C31.1 D2.2 D17.2 J1.1 M1.3 R1.2 R83.2 R101.2 U10.5 | length 111.6
  Top Layer w0.508: R1.2 56.018,4.64 C30.1
  Bottom Layer w1.27: v2(9.83,38.826) 9.819,38.826 2.946,31.953 2.946,16.256 17.78,1.422 32.664,1.422 35.738,4.496 36.855,4.496 ; v2(36.855,13.995) v2(36.855,13.31) v2(36.855,12.598) 36.855,4.496 ; 64.516,7.62 64.516,5.537 60.401,1.422 48.387,1.422 45.314,4.496 36.855,4.496
pads on no net: J1.2 J1.4 SW1.MT1 SW1.MT2 U1.4 U1.17 U1.18 U1.19 U1.20 U1.21 U1.22 U1.31 U1.32 U4.6 USB3.A5 USB3.A8 USB3.B5 USB3.B8 USB3.G

## Polygon pours and split planes (outlines as drawn)
NetR67_2 on Top Layer "GND_L02_P-001" (solid, remove dead copper, pour order 12): 23.343,7.061 23.343,3.607 22.077,3.607 20.015,5.768 20.015,7.061
AVCC on Top Layer "GND_L02_P-001" (solid, remove dead copper, pour order 10): 21.488,14.326 21.488,12.903 22.123,12.268 23.216,12.268 23.216,10.287 22.936,10.287 19.888,10.287 19.888,14.326
NetJ2_4 on Top Layer "GND_L02_P-001" (solid, remove dead copper, pour order 20): 34.163,8.407 34.163,2.921 35.585,1.499 37.567,1.499 37.567,8.407
VIN on Top Layer "GND_L02_P-001" (solid, remove dead copper, pour order 22): 37.643,18.644 37.643,12.014 36.043,12.014 36.043,18.644
NetD17_1 on Top Layer "GND_L02_P-001" (solid, remove dead copper, pour order 28): 38.303,18.237 41.275,18.237 41.275,18.161 42.342,17.094 42.342,12.065 40.538,12.065 40.513,12.09 40.513,14.681 39.776,15.418 38.303,15.418
DVCC on Top Layer "GND_L02_P-001" (solid, remove dead copper, pour order 14): 51.664,29.134 56.21,29.134 56.236,29.108 56.236,24.409 54.051,22.225 51.714,22.225
GND on Top Layer "GND_L02_P-001" (solid, remove dead copper, pour order 38): 52.438,15.113 60.325,15.113 60.35,15.088 60.35,13.513 65.354,13.513 65.354,11.684 62.433,11.684 62.433,9.373 59.639,9.373 59.639,6.35 55.042,6.35 55.042,13.03 55.016,13.005 52.464,13.005
GND on Top Layer "GND_L02_P-001" (solid, remove dead copper, pour order 40): 50.648,5.563 51.841,5.563 51.841,6.629 53.188,6.629 53.188,1.956 51.841,1.956 51.841,4.851 50.648,4.851
5V on Top Layer "GND_L02_P-001" (solid, remove dead copper, pour order 4): 48.311,12.979 51.613,12.979 51.613,15.773 52.4,16.561 60.604,16.561 60.604,19.761 63.881,19.761 63.881,24.562 59.182,24.562 59.182,18.644 52.042,18.644 48.311,14.956
GND on Top Layer "GND_L02_P-001" (solid, remove dead copper, pour order 34): 47.447,0 47.447,19.558 70.002,19.558 70.002,50.013 0,50.013 0,0
VIN on Top Layer "GND_L02_P-001" (solid, remove dead copper, pour order 0): 65.583,7.004 65.583,8.687 62.357,8.687 59.538,5.867 54.915,5.867 54.61,5.563 53.365,5.563 53.365,4.724 54.813,4.724 55.222,4.14 62.058,4.14
NetC32_1 on Top Layer "GND_L02_P-001" (solid, remove dead copper, pour order 2): 53.365,5.766 54.559,5.766 54.585,5.74 54.585,12.497 52.832,12.497 51.511,11.176 48.311,11.176 48.311,7.366 48.311,7.137 53.365,7.137
GND on Bottom Layer "GND_L02_P-001" (solid, remove dead copper, pour order 32): 0,50.013 0,0 70.002,0 70.002,0.025 70.002,50.013

## Silkscreen, mask and mechanical layers (free items; w line width, h text height)
Mechanical 1:
  the board outline again, w0.254

## Text inside footprints (layer, text, board x,y; h text height)
R86: Mechanical 1 "0.96OLED" at 15.48,17.916 h1.52
U2: Top Overlay "CS" at 22.147,25.767 h1 r270; Top Overlay "DC" at 24.649,25.767 h1 r270; Top Overlay "RES" at 27.148,25.767 h1 r270; Top Overlay "D1" at 29.391,25.767 h1 r270; Top Overlay "D0" at 32.398,25.767 h1 r270; Top Overlay "VCC" at 34.897,25.767 h1 r270; Top Overlay "GND" at 37.399,25.767 h1 r270